# Altium PCB Main.PcbDoc (part 3 of 4)
Units mm, origin at the board's own origin, x right, y up, seen from the top; angles counter-clockwise.
Board outline 282.3 x 31.89 mm, 2 copper layers (Top Layer, Bottom Layer); 208 components, 197 nets, 886 pads, 366 vias.
Unrouted connection lines stored in the file: 118.
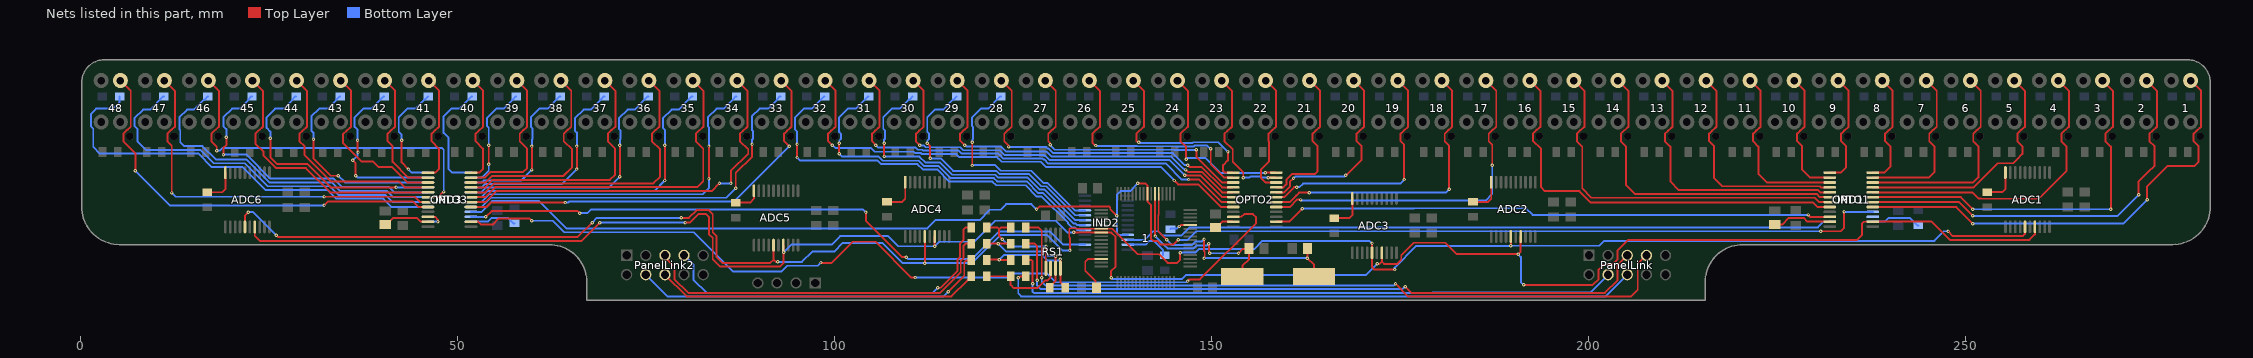
[diagram p3: the nets of this part, all layers, seen from the top]

## Via types
v1: diameter 0.45, hole 0.2, Top Layer to Bottom Layer, 362 vias
v2: diameter 5.5, hole 3.2, Top Layer to Bottom Layer, 4 vias

## Nets (pads, with @x,y where several pads share a name; then routed paths per layer and width w, separated by ;. In a path a pad name is that pad's centre, name@x,y a point inside that pad or via, vN(x,y) a via of type N, cw(c..) or ccw(c..) an arc to the next point about the centre after c; other vN are vias at no path point) (continued)
LED_IND28: IND2.9 L1_IndicatorLED28.K | length 28.8
  Top Layer w0.254: v1(118.237,31.232) 118.237,28.159 v1(118.246,28.15)
  Bottom Layer w0.254: v1(118.237,31.232) 118.241,31.236 118.241,31.577 118.342,31.677 118.342,33.248 118.22,33.37 118.22,34.527 119.38,35.687 120.326,35.687 121.944,37.305 L1_IndicatorLED28.K@122.019,37.305 ; v1(118.246,28.15) 118.284,28.188 118.422,28.188 118.429,28.194 121.285,28.194 121.466,28.013 121.473,28.013 122.035,27.451 126.085,27.451 127.682,25.854 128.204,25.854 131.859,22.199 IND2.9@133.167,22.199
LED_IND29: IND2.8 L1_IndicatorLED29.K | length 34.5
  Top Layer w0.254: v1(112.268,31.124) 112.268,31.071 112.649,30.69 v1(112.649,29.112)
  Bottom Layer w0.254: v1(112.268,31.124) 112.268,31.445 112.5,31.677 112.5,32.363 112.268,32.595 112.268,34.544 113.284,35.56 114.357,35.56 115.679,36.882 115.754,36.882 L1_IndicatorLED29.K@116.177,37.305 ; v1(112.649,29.112) 112.678,29.083 114.046,29.083 115.697,27.432 121.412,27.432 121.847,26.997 125.784,26.997 127.381,25.4 128.016,25.4 131.867,21.549 IND2.8@133.167,21.549
LED_IND30: IND2.7 L1_IndicatorLED30.K | length 40.5
  Top Layer w0.254: v1(106.553,31.115) 106.553,29.363 v1(106.566,29.35)
  Bottom Layer w0.254: v1(106.553,31.115) 106.553,31.572 106.658,31.677 106.658,32.796 106.426,33.028 106.426,34.544 107.569,35.687 108.587,35.687 109.783,36.882 109.912,36.882 L1_IndicatorLED30.K@110.335,37.305 ; v1(106.566,29.35) 106.579,29.337 111.233,29.337 112.039,28.531 113.956,28.531 115.563,26.924 121.278,26.924 121.659,26.543 125.596,26.543 127.193,24.946 127.828,24.946 131.873,20.901 132.141,20.901 132.143,20.899 IND2.7@133.167,20.899
LED_IND31: IND2.6 L1_IndicatorLED31.K | length 46.6
  Top Layer w0.254: v1(100.584,29.718) v1(100.584,31.115)
  Bottom Layer w0.254: v1(100.584,29.718) 100.936,29.366 105.744,29.366 105.782,29.327 105.808,29.327 106.35,28.785 111.143,28.785 111.851,28.077 113.768,28.077 115.375,26.47 121.09,26.47 121.525,26.035 125.462,26.035 127.005,24.492 127.64,24.492 131.685,20.447 131.953,20.447 132.151,20.249 IND2.6@133.167,20.249 ; v1(100.584,31.115) 100.593,31.124 100.593,31.455 100.816,31.677 100.816,32.363 100.584,32.595 100.584,34.544 101.727,35.687 102.8,35.687 104.418,37.305 L1_IndicatorLED31.K@104.493,37.305
LED_IND32: IND2.5 L1_IndicatorLED32.K | length 52.7
  Top Layer w0.254: v1(94.996,29.21) v1(94.996,30.988)
  Bottom Layer w0.254: v1(94.996,29.21) 95.377,28.829 105.664,28.829 106.162,28.331 110.955,28.331 111.663,27.623 113.58,27.623 115.187,26.016 120.902,26.016 121.391,25.527 125.328,25.527 126.817,24.038 127.452,24.038 130.937,20.553 130.937,20.447 131.445,19.939 131.819,19.939 132.141,19.617 133.149,19.617 IND2.5@133.167,19.599 ; v1(94.996,30.988) 94.996,32.639 94.742,32.893 94.742,34.544 95.885,35.687 96.967,35.687 98.153,36.873 98.153,36.882 98.576,37.305 L1_IndicatorLED32.K@98.651,37.305
LED_IND33: IND3.20 L1_IndicatorLED33.K | length 51.6
  Top Layer w0.254: v1(86.868,25.146) 86.868,27.178 89.027,29.337 v1(89.027,30.988)
  Bottom Layer w0.254: IND3.20@51.745,22.647 53.12,22.647 54.352,23.88 60.964,23.88 60.967,23.876 85.598,23.876 v1(86.868,25.146) ; v1(89.027,30.988) 89.027,31.572 89.132,31.677 89.132,32.732 89.01,32.854 89.01,34.654 90.043,35.687 91.191,35.687 92.311,36.807 92.311,36.882 92.734,37.305 L1_IndicatorLED33.K@92.809,37.305
LED_IND34: IND3.19 L1_IndicatorLED34.K | length 46.7
  Top Layer w0.254: v1(83.312,26.416) v1(83.312,30.734)
  Bottom Layer w0.254: IND3.19@51.745,23.297 53.128,23.297 54.164,24.334 82.5,24.334 83.312,25.146 v1(83.312,26.416) ; v1(83.312,30.734) 83.312,33.226 83.168,33.37 83.168,34.47 83.185,34.487 83.185,34.544 84.328,35.687 85.274,35.687 86.469,36.882 86.892,37.305 L1_IndicatorLED34.K@86.967,37.305
LED_IND35: IND3.18 L1_IndicatorLED35.K | length 40.1
  Top Layer w0.254: v1(77.47,26.162) v1(77.47,30.861)
  Bottom Layer w0.254: IND3.18@51.745,23.947 53.136,23.947 53.976,24.788 76.096,24.788 v1(77.47,26.162) ; v1(77.47,30.861) 77.47,32.893 77.216,33.147 77.216,34.417 78.359,35.56 79.305,35.56 81.05,37.305 L1_IndicatorLED35.K@81.125,37.305
LED_IND36: IND3.17 L1_IndicatorLED36.K | length 33.6
  Top Layer w0.254: v1(71.501,26.67) v1(71.501,30.861)
  Bottom Layer w0.254: IND3.17@51.745,24.597 53.144,24.597 53.788,25.242 70.073,25.242 v1(71.501,26.67) ; v1(71.501,30.861) 71.501,31.572 71.606,31.677 71.606,32.788 71.374,33.02 71.374,34.417 72.517,35.56 73.463,35.56 75.208,37.305 L1_IndicatorLED36.K@75.283,37.305
LED_IND37: IND3.16 L1_IndicatorLED37.K | length 27
  Top Layer w0.254: v1(65.786,27.686) v1(65.786,30.734)
  Bottom Layer w0.254: IND3.16@51.745,25.247 53.152,25.247 53.6,25.696 63.796,25.696 v1(65.786,27.686) ; v1(65.786,30.734) 65.786,32.512 65.532,32.766 65.532,34.417 66.675,35.56 67.621,35.56 68.943,36.882 69.366,37.305 L1_IndicatorLED37.K@69.441,37.305
LED_IND38: IND3.15 L1_IndicatorLED38.K | length 20.9
  Top Layer w0.254: v1(59.817,27.559) v1(59.817,30.734)
  Bottom Layer w0.254: IND3.15@51.745,25.897 53.16,25.897 53.412,26.15 54.09,26.15 54.102,26.162 58.42,26.162 v1(59.817,27.559) ; v1(59.817,30.734) 59.817,31.572 59.922,31.677 59.922,33.042 59.69,33.274 59.69,34.544 60.833,35.687 61.906,35.687 63.524,37.305 L1_IndicatorLED38.K@63.599,37.305
LED_IND39: IND3.14 L1_IndicatorLED39.K | length 14.9
  Top Layer w0.254: v1(54.102,28.321) v1(54.102,30.861)
  Bottom Layer w0.254: IND3.14@51.749,26.543 IND3.14@51.745,26.547 53.168,26.547 53.224,26.604 53.274,26.604 54.102,27.432 v1(54.102,28.321) ; v1(54.102,30.861) 54.102,33.147 53.848,33.401 53.848,34.417 55.118,35.687 56.064,35.687 57.259,36.882 57.682,37.305 L1_IndicatorLED39.K@57.757,37.305
LED_IND40: IND3.13 L1_IndicatorLED40.K | length 15.3
  Bottom Layer w0.254: IND3.13@51.745,27.197 49.257,27.197 48.768,27.686 48.768,31.833 48.116,32.485 48.116,34.654 49.149,35.687 50.222,35.687 51.84,37.305 L1_IndicatorLED40.K@51.915,37.305
LED_IND41: IND3.12 L1_IndicatorLED41.K | length 15.3
  Top Layer w0.254: v1(42.545,31.496) 42.545,28.575 v1(43.434,27.686)
  Bottom Layer w0.254: v1(42.545,31.496) 42.545,32.214 42.164,32.595 42.164,34.544 43.307,35.687 44.325,35.687 45.521,36.882 45.65,36.882 L1_IndicatorLED41.K@46.073,37.305 ; v1(43.434,27.686) 43.923,27.197 IND3.12@46.045,27.197
LED_IND42: IND3.11 L1_IndicatorLED42.K | length 23.1
  Top Layer w0.254: v1(36.068,28.829) 36.449,28.448 v1(36.449,26.797) ; v1(36.703,31.496) 36.703,30.099 36.728,30.074 36.728,29.966 v1(36.766,29.928)
  Bottom Layer w0.254: v1(36.068,28.829) 36.703,29.464 36.703,29.727 36.728,29.752 36.728,29.89 v1(36.766,29.928) ; v1(36.449,26.797) 36.699,26.547 IND3.11@46.045,26.547 ; v1(36.703,31.496) 36.703,32.893 36.322,33.274 36.322,34.544 37.465,35.687 38.538,35.687 39.733,36.882 40.156,37.305 L1_IndicatorLED42.K@40.231,37.305
LED_IND43: IND3.10 L1_IndicatorLED43.K | length 27.1
  Top Layer w0.254: v1(30.861,31.623) 30.861,29.083 33.147,26.797 v1(34.163,26.797)
  Bottom Layer w0.254: v1(30.861,31.623) 30.861,32.512 30.59,32.783 30.59,34.654 31.623,35.687 32.771,35.687 33.891,36.807 33.891,36.882 34.314,37.305 L1_IndicatorLED43.K@34.389,37.305 ; v1(34.163,26.797) 35.063,25.897 IND3.10@46.045,25.897
LED_IND44: IND3.9 L1_IndicatorLED44.K | length 33.2
  Top Layer w0.254: v1(25.146,31.75) 25.146,29.217 26.039,28.325 30.095,28.325 33.173,25.247 v1(41.809,25.247)
  Bottom Layer w0.254: v1(25.146,31.75) 25.146,32.639 24.638,33.147 24.638,34.544 25.781,35.687 26.929,35.687 28.049,36.807 28.049,36.882 28.472,37.305 L1_IndicatorLED44.K@28.547,37.305 ; v1(41.809,25.247) IND3.9@46.045,25.247
LED_IND45: IND3.8 L1_IndicatorLED45.K | length 39.4
  Top Layer w0.254: v1(18.923,29.591) 18.923,30.48 19.304,30.861 v1(19.304,31.877)
  Bottom Layer w0.254: v1(18.923,29.591) 21.978,29.591 25.153,26.416 33.528,26.416 34.671,25.273 40.894,25.273 41.57,24.597 IND3.8@46.045,24.597 ; v1(19.304,31.877) 19.304,32.972 18.906,33.37 18.906,34.47 18.923,34.487 18.923,34.544 20.066,35.687 21.087,35.687 22.207,36.807 22.207,36.882 22.63,37.305 L1_IndicatorLED45.K@22.705,37.305
LED_IND46: IND3.7 L1_IndicatorLED46.K | length 44.2
  Bottom Layer w0.254: L1_IndicatorLED46.K@16.863,37.305 16.44,36.882 16.308,36.882 14.986,35.56 14.097,35.56 13.081,34.544 13.081,34.487 13.064,34.47 13.064,32.928 13.186,32.806 13.186,31.264 13.716,30.734 16.129,30.734 17.907,28.956 21.971,28.956 25.019,25.908 33.274,25.908 34.417,24.765 40.64,24.765 41.458,23.947 IND3.7@46.045,23.947
LED_IND47: IND3.6 L1_IndicatorLED47.K | length 50.2
  Bottom Layer w0.254: L1_IndicatorLED47.K@11.021,37.305 10.946,37.305 9.201,35.56 8.255,35.56 7.112,34.417 7.112,33.401 7.493,33.02 7.493,31.369 8.636,30.226 15.868,30.226 17.646,28.448 21.717,28.448 24.765,25.4 33.02,25.4 34.163,24.257 40.386,24.257 41.346,23.297 IND3.6@46.045,23.297
LED_IND48: IND3.5 L1_IndicatorLED48.K | length 57.4
  Bottom Layer w0.254: L1_IndicatorLED48.K@5.154,37.28 5.154,36.523 4.318,35.687 2.032,35.687 1.326,34.981 1.326,33.348 1.651,33.023 1.651,30.607 2.54,29.718 15.621,29.718 17.399,27.94 21.463,27.94 24.511,24.892 32.766,24.892 33.909,23.749 40.132,23.749 41.234,22.647 IND3.5@46.045,22.647
LED_SENS1: 1.K OPTO1.5 | length 60.6
  Top Layer w0.254: OPTO1.5@237.673,22.647 248.752,22.647 v1(250.952,20.447) ; v1(274.066,23.622) 274.066,25.4 276.733,28.067 280.328,28.067 280.88,28.619 280.88,30.701 280.21,31.371 280.21,32.385 280.616,32.79 ccw(c278.091,36.38) 281.202,33.285 281.202,38.039 1.K@279.821,39.42
  Bottom Layer w0.254: v1(250.952,20.447) 270.891,20.447 v1(274.066,23.622)
LED_SENS2: 2.K OPTO1.6 | length 54.5
  Top Layer w0.254: OPTO1.6@237.673,23.297 249.118,23.297 v1(250.952,21.463) ; v1(272.923,24.257) 272.923,26.032 273.59,26.699 274.164,27.273 275.038,28.147 275.038,30.701 274.368,31.371 274.368,32.385 274.774,32.79 ccw(c272.249,36.38) 275.36,33.285 275.36,38.039 2.K@273.979,39.42
  Bottom Layer w0.254: v1(250.952,21.463) 270.129,21.463 v1(272.923,24.257)
LED_SENS3: 3.K OPTO1.7 | length 50.6
  Top Layer w0.254: OPTO1.7@237.673,23.947 249.357,23.947 v1(250.952,22.352) ; 3.K@268.137,39.42 269.518,38.039 269.518,33.285 cw(c266.407,36.38) 268.932,32.79 268.526,32.385 268.526,31.371 269.24,30.657 269.24,28.575 v1(269.24,22.352)
  Bottom Layer w0.254: v1(250.952,22.352) v1(269.24,22.352)
LED_SENS4: 4.K OPTO1.8 | length 40.9
  Top Layer w0.254: OPTO1.8@237.673,24.597 250.866,24.597 251.714,23.749 252.041,23.749 252.049,23.741 259.707,23.741 263.354,27.388 263.354,30.701 262.684,31.371 262.684,32.385 263.09,32.79 ccw(c260.565,36.38) 263.676,33.285 263.676,38.039 4.K@262.295,39.42
LED_SENS5: 5.K OPTO1.9 | length 32.7
  Top Layer w0.254: OPTO1.9@237.673,25.247 251.053,25.247 254.259,28.453 256.286,28.453 256.741,28.908 257.512,29.679 257.512,30.701 256.842,31.371 256.842,32.385 257.248,32.79 ccw(c254.723,36.38) 257.834,33.285 257.834,38.039 5.K@256.453,39.42
LED_SENS6: 6.K OPTO1.10 | length 28.4
  Top Layer w0.254: OPTO1.10@237.673,25.897 250.985,25.897 251.67,26.582 251.67,30.701 251,31.371 251,32.385 251.406,32.79 ccw(c248.881,36.38) 251.992,33.285 251.992,38.039 6.K@250.611,39.42
LED_SENS7: 7.K OPTO1.11 | length 21.9
  Top Layer w0.254: OPTO1.11@237.673,26.547 245.114,26.547 245.828,27.261 245.828,30.701 245.158,31.371 245.158,32.385 245.564,32.79 ccw(c243.039,36.38) 246.15,33.285 246.15,38.039 7.K@244.769,39.42
LED_SENS8: 8.K OPTO1.12 | length 15.4
  Top Layer w0.254: OPTO1.12@237.673,27.197 239.16,27.197 240.03,28.067 240.03,30.657 239.316,31.371 239.316,32.385 239.722,32.79 ccw(c237.197,36.38) 240.308,33.285 240.308,38.039 8.K@238.927,39.42
LED_SENS9: 9.K OPTO1.13 | length 15.3
  Top Layer w0.254: OPTO1.13@231.973,27.197 233.445,27.197 234.144,27.896 234.144,30.701 233.474,31.371 233.474,32.385 233.88,32.79 ccw(c231.355,36.38) 234.466,33.285 234.466,38.039 9.K@233.085,39.42
LED_SENS10: 10.K OPTO1.14 | length 17.2
  Top Layer w0.254: 10.K@227.243,39.42 228.624,38.039 228.624,33.285 cw(c225.513,36.38) 228.038,32.79 227.632,32.385 227.632,31.371 228.302,30.701 228.302,27.603 229.358,26.547 OPTO1.14@231.973,26.547
LED_SENS11: 11.K OPTO1.15 | length 23.6
  Top Layer w0.254: 11.K@221.401,39.42 222.782,38.039 222.782,33.285 cw(c219.671,36.38) 222.196,32.79 221.79,32.385 221.79,31.371 222.504,30.657 222.504,27.03 223.626,25.908 230.886,25.908 230.897,25.897 OPTO1.15@231.973,25.897
LED_SENS12: 12.K OPTO1.16 | length 30.1
  Top Layer w0.254: 12.K@215.559,39.42 216.94,38.039 216.94,33.285 cw(c213.829,36.38) 216.354,32.79 215.948,32.385 215.948,31.371 216.618,30.701 216.618,26.46 217.678,25.4 230.628,25.4 230.781,25.247 OPTO1.16@231.973,25.247
LED_SENS13: 13.K OPTO1.17 | length 36.4
  Top Layer w0.254: 13.K@209.717,39.42 211.098,38.039 211.098,33.285 cw(c207.987,36.38) 210.512,32.79 210.106,32.385 210.106,31.371 210.82,30.657 210.82,26.035 211.963,24.892 230.418,24.892 230.713,24.597 OPTO1.17@231.973,24.597
LED_SENS14: 14.K OPTO1.18 | length 42.9
  Top Layer w0.254: 14.K@203.875,39.42 205.256,38.039 205.256,33.285 cw(c202.145,36.38) 204.67,32.79 204.264,32.385 204.264,31.371 204.934,30.701 204.934,25.571 206.121,24.384 230.207,24.384 230.644,23.947 OPTO1.18@231.973,23.947
LED_SENS15: 15.K OPTO1.19 | length 49.2
  Top Layer w0.254: 15.K@198.033,39.42 199.414,38.039 199.414,33.285 cw(c196.303,36.38) 198.828,32.79 198.422,32.385 198.422,31.371 199.136,30.657 199.136,25.102 200.362,23.876 229.997,23.876 230.576,23.297 OPTO1.19@231.973,23.297
LED_SENS16: 16.K OPTO1.20 | length 55
  Top Layer w0.254: 16.K@192.191,39.42 193.572,38.039 193.572,33.285 cw(c190.461,36.38) 192.986,32.79 192.58,32.385 192.58,31.448 193.675,30.353 193.675,25.273 194.183,24.765 198.755,24.765 200.279,23.241 229.747,23.241 230.343,22.645 231.971,22.645 OPTO1.20@231.973,22.647
LED_SENS17: 17.K OPTO2.5 | length 45.7
  Top Layer w0.254: OPTO2.5@158.552,22.647 160.315,22.647 161.29,23.622 161.296,23.616 161.76,23.616 v1(161.798,23.578) ; 17.K@186.349,39.42 187.73,38.039 187.73,33.285 cw(c184.619,36.38) 187.144,32.79 186.738,32.385 186.738,31.371 187.198,30.911 v1(187.198,28.194)
  Bottom Layer w0.254: v1(161.798,23.578) 161.851,23.578 161.934,23.495 186.309,23.495 187.198,24.384 v1(187.198,28.194)
LED_SENS18: 18.K OPTO2.6 | length 39.3
  Top Layer w0.254: OPTO2.6@158.552,23.297 160.323,23.297 161.181,24.155 161.188,24.155 161.588,24.555 v1(162.941,24.555) ; 18.K@180.507,39.42 181.888,38.039 181.888,33.285 cw(c178.777,36.38) 181.302,32.79 180.896,32.385 180.896,31.371 181.483,30.784 v1(181.483,25.019)
  Bottom Layer w0.254: v1(162.941,24.555) 181.015,24.555 181.479,25.019 v1(181.483,25.019)
LED_SENS19: 19.K OPTO2.7 | length 32.3
  Top Layer w0.254: OPTO2.7@158.552,23.947 159.583,23.947 160.909,25.273 v1(161.29,25.273) ; 19.K@174.665,39.42 176.046,38.039 176.046,33.285 cw(c172.935,36.38) 175.46,32.79 175.054,32.385 175.054,31.371 175.514,30.911 v1(175.514,26.289)
  Bottom Layer w0.254: v1(161.29,25.273) 161.294,25.277 161.635,25.277 162.12,25.762 174.987,25.762 v1(175.514,26.289)
LED_SENS20: 20.K OPTO2.8 | length 25.3
  Top Layer w0.254: OPTO2.8@158.552,24.597 159.591,24.597 160.401,25.407 160.401,26.035 160.782,26.416 160.801,26.416 v1(160.845,26.46) ; v1(167.767,26.841) 167.811,26.841 169.882,28.912 169.882,30.701 169.212,31.371 169.212,32.385 169.618,32.79 ccw(c167.093,36.38) 170.204,33.285 170.204,38.039 20.K@168.823,39.42
  Bottom Layer w0.254: v1(160.845,26.46) 160.879,26.46 161.089,26.67 167.543,26.67 167.714,26.841 v1(167.767,26.841)
LED_SENS21: 21.K OPTO2.9 | length 20.1
  Top Layer w0.254: OPTO2.9@158.552,25.247 158.562,25.257 159.496,25.257 159.893,25.654 159.893,26.289 160.655,27.051 163.703,27.051 164.04,27.388 164.04,30.701 163.37,31.371 163.37,32.385 163.776,32.79 ccw(c161.251,36.38) 164.362,33.285 164.362,38.039 21.K@162.981,39.42
LED_SENS22: 22.K OPTO2.10 | length 16.7
  Top Layer w0.254: 22.K@157.139,39.42 158.52,38.039 158.52,33.285 cw(c155.409,36.38) 157.934,32.79 157.528,32.385 157.528,31.371 157.596,31.303 157.596,28.691 156.547,27.642 156.547,26.46 157.11,25.897 OPTO2.10@158.552,25.897
LED_SENS23: 23.K OPTO2.11 | length 19.4
  Top Layer w0.254: 23.K@151.297,39.42 152.678,38.039 152.678,33.285 cw(c149.567,36.38) 152.092,32.79 151.686,32.385 151.686,31.371 152.781,30.276 152.781,28.653 153.735,27.699 154.178,27.256 v1(154.178,26.543) ; v1(157.48,26.543) 157.482,26.545 158.55,26.545 OPTO2.11@158.552,26.547
  Bottom Layer w0.254: v1(154.178,26.543) 155.004,26.543 155.13,26.67 156.528,26.67 156.654,26.543 v1(157.48,26.543)
LED_SENS24: 24.K OPTO2.12 | length 24.6
  Top Layer w0.254: 24.K@145.455,39.42 146.836,38.039 146.836,33.285 cw(c143.725,36.38) 146.25,32.79 145.844,32.385 145.844,31.371 146.602,30.613 v1(146.602,28.966) ; v1(157.099,27.178) 157.118,27.197 OPTO2.12@158.552,27.197
  Bottom Layer w0.254: v1(146.602,28.966) 146.807,29.171 149.137,29.171 151.13,27.178 v1(157.099,27.178)
LED_SENS25: 25.K OPTO2.13 | length 26.1
  Top Layer w0.254: 25.K@139.613,39.42 140.994,38.039 140.994,33.285 cw(c137.883,36.38) 140.408,32.79 140.002,32.385 140.002,31.4 140.113,31.289 140.297,31.289 v1(140.335,31.251) ; v1(152.146,29.972) 152.146,28.829 151.511,28.194 151.511,27.432 151.746,27.197 OPTO2.13@152.852,27.197
  Bottom Layer w0.254: v1(140.335,31.251) 140.388,31.251 140.486,31.153 145.398,31.153 145.417,31.134 147.44,31.134 147.538,31.232 150.886,31.232 v1(152.146,29.972)
LED_SENS26: 26.K OPTO2.14 | length 31.1
  Top Layer w0.254: 26.K@133.771,39.42 135.152,38.039 135.152,33.285 cw(c132.041,36.38) 134.566,32.79 134.16,32.385 134.16,31.181 134.446,30.895 134.469,30.895 134.567,30.797 v1(134.62,30.797) ; v1(149.86,30.353) 149.86,28.321 151.634,26.547 OPTO2.14@152.852,26.547
  Bottom Layer w0.254: v1(134.62,30.797) 134.658,30.759 134.796,30.759 134.822,30.734 140.071,30.734 140.106,30.699 145.21,30.699 145.229,30.68 147.628,30.68 147.726,30.778 149.382,30.778 149.807,30.353 v1(149.86,30.353)
LED_SENS27: 27.K OPTO2.15 | length 36.6
  Top Layer w0.254: 27.K@127.929,39.42 129.31,38.039 129.31,33.285 cw(c126.199,36.38) 128.724,32.79 128.318,32.385 128.318,31.371 128.524,31.165 128.524,30.964 v1(128.56,30.928) ; v1(147.955,30.226) 147.955,29.299 151.357,25.897 OPTO2.15@152.852,25.897
  Bottom Layer w0.254: v1(128.56,30.928) 128.56,30.875 128.658,30.777 128.658,30.741 129.154,30.245 145.022,30.245 145.041,30.226 v1(147.955,30.226)
LED_SENS28: 28.K OPTO2.16 | length 42.1
  Top Layer w0.254: 28.K@122.087,39.42 123.468,38.039 123.468,33.285 cw(c120.357,36.38) 122.882,32.79 122.476,32.385 122.476,31.371 123.063,30.784 v1(123.063,30.607) ; v1(146.812,28.194) 147.066,27.94 148.672,27.94 151.365,25.247 OPTO2.16@152.852,25.247
  Bottom Layer w0.254: v1(123.063,30.607) 128.016,30.607 128.197,30.426 128.331,30.426 128.966,29.791 144.834,29.791 146.431,28.194 v1(146.812,28.194)
LED_SENS29: 29.K OPTO2.17 | length 48
  Top Layer w0.254: 29.K@116.245,39.42 117.626,38.039 117.626,33.285 cw(c114.515,36.38) 117.04,32.79 116.634,32.385 116.634,31.448 v1(117.221,30.861) ; v1(146.558,27.559) 146.812,27.305 148.664,27.305 151.372,24.597 OPTO2.17@152.852,24.597
  Bottom Layer w0.254: v1(117.221,30.861) 117.274,30.861 117.455,30.68 121.981,30.68 122.035,30.626 122.07,30.626 122.686,30.01 127.879,30.01 127.917,29.972 128.143,29.972 128.778,29.337 144.646,29.337 146.243,27.74 146.25,27.74 146.333,27.657 146.407,27.657 146.505,27.559 v1(146.558,27.559)
LED_SENS30: 30.K OPTO2.18 | length 54.2
  Top Layer w0.254: 30.K@110.403,39.42 111.784,38.039 111.784,33.285 cw(c108.673,36.38) 111.198,32.79 110.792,32.385 110.792,31.321 v1(111.252,30.861) ; v1(146.431,26.841) 148.486,26.841 151.38,23.947 OPTO2.18@152.852,23.947
  Bottom Layer w0.254: v1(111.252,30.861) 111.29,30.823 111.788,30.823 112.039,30.572 116.621,30.572 116.64,30.553 116.647,30.553 117.028,30.172 121.868,30.172 122.03,30.01 122.044,30.01 122.498,29.556 127.691,29.556 127.764,29.483 127.87,29.483 127.943,29.41 127.95,29.41 128.477,28.883 144.345,28.883 146.387,26.841 v1(146.431,26.841)
LED_SENS31: 31.K OPTO2.19 | length 60.4
  Top Layer w0.254: 31.K@104.561,39.42 105.942,38.039 105.942,33.285 cw(c102.831,36.38) 105.356,32.79 104.95,32.385 104.95,31.371 105.46,30.861 v1(105.41,30.861) ; v1(146.92,26.289) 148.336,26.289 151.328,23.297 OPTO2.19@152.852,23.297
  Bottom Layer w0.254: v1(105.41,30.861) 105.424,30.861 105.722,30.563 110.661,30.563 110.979,30.245 111.609,30.245 111.736,30.118 116.44,30.118 116.84,29.718 121.68,29.718 121.842,29.556 121.856,29.556 122.31,29.102 127.503,29.102 127.649,28.956 127.762,28.956 128.324,28.394 143.945,28.394 146.05,26.289 v1(146.92,26.289)
LED_SENS32: 32.K OPTO2.20 | length 66.5
  Top Layer w0.254: 32.K@98.719,39.42 100.1,38.039 100.1,33.285 cw(c96.989,36.38) 99.514,32.79 99.108,32.385 99.108,31.371 99.663,30.816 v1(99.663,30.861) ; v1(145.034,26.162) 145.542,25.654 148.209,25.654 151.208,22.655 151.38,22.655 151.388,22.647 OPTO2.20@152.852,22.647
  Bottom Layer w0.254: v1(99.663,30.861) 99.695,30.861 100.076,30.48 104.775,30.48 105.283,29.972 110.497,29.972 110.678,29.791 111.421,29.791 111.548,29.664 116.132,29.664 116.532,29.264 121.492,29.264 121.654,29.102 121.668,29.102 122.122,28.648 127.315,28.648 128.023,27.94 143.275,27.94 145.034,26.181 v1(145.034,26.162)
LED_SENS33: 33.K OPTO3.5 | length 55.5
  Top Layer w0.254: OPTO3.5@51.745,22.647 53.748,22.647 54.342,23.241 v1(64.262,23.241) ; 33.K@92.877,39.42 94.258,38.039 94.258,33.285 cw(c91.147,36.38) 93.672,32.79 93.266,32.385 93.266,31.371 v1(93.936,30.701)
  Bottom Layer w0.254: v1(64.262,23.241) 64.643,23.241 64.77,23.368 86.603,23.368 v1(93.936,30.701)
LED_SENS34: 34.K OPTO3.6 | length 51.6
  Top Layer w0.254: OPTO3.6@51.745,23.297 53.65,23.297 55.118,24.765 83.693,24.765 v1(84.709,25.781) ; v1(86.233,25.781) 86.233,27.432 88.519,29.718 88.519,30.276 87.424,31.371 87.424,32.385 87.83,32.79 ccw(c85.305,36.38) 88.416,33.285 88.416,38.039 34.K@87.035,39.42
  Bottom Layer w0.254: v1(84.709,25.781) v1(86.233,25.781)
LED_SENS35: 35.K OPTO3.7 | length 46.5
  Top Layer w0.254: OPTO3.7@51.745,23.947 53.658,23.947 54.984,25.273 81.788,25.273 82.55,26.035 82.55,30.403 81.582,31.371 81.582,32.385 81.988,32.79 ccw(c79.463,36.38) 82.574,33.285 82.574,38.039 35.K@81.193,39.42
LED_SENS36: 36.K OPTO3.8 | length 40.2
  Top Layer w0.254: OPTO3.8@51.745,24.597 53.666,24.597 54.85,25.781 75.946,25.781 76.835,26.67 76.835,30.276 75.74,31.371 75.74,32.385 76.146,32.79 ccw(c73.621,36.38) 76.732,33.285 76.732,38.039 36.K@75.351,39.42
LED_SENS37: 37.K OPTO3.9 | length 33.7
  Top Layer w0.254: OPTO3.9@51.745,25.247 53.674,25.247 54.662,26.235 70.177,26.235 70.866,26.924 70.866,30.403 69.898,31.371 69.898,32.385 70.304,32.79 ccw(c67.779,36.38) 70.89,33.285 70.89,38.039 37.K@69.509,39.42
LED_SENS38: 38.K OPTO3.10 | length 27.2
  Top Layer w0.254: OPTO3.10@51.745,25.897 53.682,25.897 54.528,26.743 63.954,26.743 65.151,27.94 65.151,30.276 64.056,31.371 64.056,32.385 64.462,32.79 ccw(c61.937,36.38) 65.048,33.285 65.048,38.039 38.K@63.667,39.42
LED_SENS39: 39.K OPTO3.11 | length 21
  Top Layer w0.254: OPTO3.11@51.745,26.547 53.598,26.547 54.356,27.305 58.674,27.305 59.182,27.813 59.182,30.403 58.214,31.371 58.214,32.385 58.62,32.79 ccw(c56.095,36.38) 59.206,33.285 59.206,38.039 39.K@57.825,39.42
LED_SENS40: 40.K OPTO3.12 | length 14.9
  Top Layer w0.254: OPTO3.12@51.745,27.197 52.851,27.197 53.34,27.686 53.34,30.403 52.372,31.371 52.372,32.385 52.778,32.79 ccw(c50.253,36.38) 53.364,33.285 53.364,38.039 40.K@51.983,39.42
LED_SENS41: 41.K OPTO3.13 | length 14.8
  Top Layer w0.254: OPTO3.13@46.045,27.197 47.009,27.197 47.498,27.686 47.498,30.403 46.53,31.371 46.53,32.385 46.936,32.79 ccw(c44.411,36.38) 47.522,33.285 47.522,38.039 41.K@46.141,39.42
LED_SENS42: 42.K OPTO3.14 | length 17.6
  Top Layer w0.254: 42.K@40.299,39.42 41.68,38.039 41.68,33.285 cw(c38.569,36.38) 41.094,32.79 40.688,32.385 40.688,31.371 41.358,30.701 41.358,28.619 43.43,26.547 OPTO3.14@46.045,26.547
LED_SENS43: 43.K OPTO3.15 | length 22.7
  Top Layer w0.254: 43.K@34.457,39.42 35.838,38.039 35.838,33.285 cw(c32.727,36.38) 35.252,32.79 34.798,32.337 34.798,31.115 37.211,28.702 38.735,28.702 38.916,28.521 38.923,28.521 39.504,27.94 41.275,27.94 43.318,25.897 OPTO3.15@46.045,25.897
LED_SENS44: 44.K OPTO3.16 | length 29.3
  Top Layer w0.254: 44.K@28.615,39.42 29.996,38.039 29.996,33.285 cw(c26.885,36.38) 29.41,32.79 29.004,32.385 29.004,31.371 29.674,30.701 29.674,29.508 33.147,26.035 42.164,26.035 42.952,25.247 OPTO3.16@46.045,25.247
LED_SENS45: 45.K OPTO3.17 | length 35.2
  Top Layer w0.254: 45.K@22.773,39.42 24.154,38.039 24.154,33.285 cw(c21.043,36.38) 23.568,32.79 23.162,32.385 23.162,31.067 24.257,29.972 24.257,29.464 25.908,27.813 29.845,27.813 33.061,24.597 OPTO3.17@46.045,24.597
LED_SENS46: 46.K OPTO3.18 | length 49
  Top Layer w0.254: 46.K@16.931,39.42 18.312,38.039 18.312,33.285 cw(c15.201,36.38) 17.726,32.79 17.32,32.385 17.32,31.371 18.034,30.657 v1(18.034,30.099) ; OPTO3.18@46.045,23.947 47.389,23.947 48.08,24.638 v1(48.133,24.638)
  Bottom Layer w0.254: v1(18.034,30.099) 18.072,30.137 18.453,30.137 18.796,30.48 47.879,30.48 48.133,30.226 v1(48.133,24.638)
LED_SENS47: 47.K OPTO3.19 | length 50.6
  Top Layer w0.254: 47.K@11.089,39.42 12.47,38.039 12.47,33.285 cw(c9.359,36.38) 11.884,32.79 11.478,32.385 11.478,31.371 12.065,30.784 v1(12.065,24.511) ; v1(32.258,24.003) 44.323,24.003 45.029,23.297 OPTO3.19@46.045,23.297
  Bottom Layer w0.254: v1(12.065,24.511) 12.573,24.003 v1(32.258,24.003)
LED_SENS48: 48.K OPTO3.20 | length 54.9
  Top Layer w0.254: 48.K@5.247,39.42 6.628,38.039 6.628,33.285 cw(c3.517,36.38) 6.042,32.79 5.636,32.385 5.636,31.371 7.239,29.768 v1(7.239,27.432) ; v1(32.258,22.86) 32.766,23.368 44.069,23.368 44.79,22.647 OPTO3.20@46.045,22.647
  Bottom Layer w0.254: v1(7.239,27.432) 11.811,22.86 v1(32.258,22.86)
MISO: 1.22 ADC1.15 ADC2.15 ADC3.15 ADC4.15 ADC5.15 ADC6.15 | length 271.8
  Top Layer w0.254: ADC6.15@21.773,20.006 21.773,21.519 v1(22.225,21.971) ; v1(25.908,18.923) 26.162,18.669 65.913,18.669 67.809,20.565 v1(67.827,20.565) ; v1(79.629,21.209) 80.645,21.209 81.661,22.225 83.312,22.225 83.82,21.717 83.82,19.304 84.328,18.796 84.328,16.002 85.09,15.24 91.44,15.24 91.877,15.677 ; ADC5.15@91.877,17.593 91.877,15.677 ; v1(92.456,15.367) 92.187,15.367 91.877,15.677 ; v1(111.943,15.196) ADC4.15@111.943,18.736 ; v1(131.191,16.891) 131.191,18.542 131.093,18.64 131.093,19.677 131.242,19.826 132.036,19.826 132.099,19.762 1.22@135.323,19.762 136.829,19.762 140.208,16.383 143.002,16.383 144.145,15.24 145.415,15.24 145.796,15.621 v1(145.796,16.593) ; v1(171.252,17.824) 171.252,14.676 171.577,14.351 v1(174.244,14.351) ; v1(189.66,17.501) 189.667,17.508 ADC2.15@189.667,18.736 ; v1(247.65,19.431) 248.285,18.796 255.031,18.796 255.036,18.791 257.551,18.791 257.848,19.088 257.848,20.004 ADC1.15@257.866,20.022
  Bottom Layer w0.254: v1(22.225,21.971) 22.86,21.971 v1(25.908,18.923) ; v1(67.827,20.565) 67.827,20.583 68.453,21.209 v1(79.629,21.209) ; v1(92.456,15.367) 95.638,15.367 97.016,16.745 99.944,16.745 101.087,17.888 106.318,17.888 109.01,15.196 v1(111.943,15.196) 111.969,15.222 118.254,15.222 121.99,18.958 128.108,18.958 130.175,16.891 v1(131.191,16.891) ; v1(145.796,16.593) 145.834,16.631 145.972,16.631 145.979,16.637 147.863,16.637 148.288,17.062 155.619,17.062 156.718,18.161 170.889,18.161 171.226,17.824 v1(171.252,17.824) ; v1(174.244,14.351) 174.244,14.605 177.14,17.501 v1(189.66,17.501) 189.667,17.508 201.404,17.508 202.057,18.161 221.615,18.161 245.828,18.161 247.098,19.431 v1(247.65,19.431)
MOSI: 1.23 ADC1.17 ADC2.17 ADC3.17 ADC4.17 ADC5.17 ADC6.17 OPTO1.2 | length 277.4
  Top Layer w0.254: ADC6.17@23.073,20.006 23.073,18.837 23.749,18.161 66.421,18.161 v1(68.834,20.574) ; v1(80.137,20.574) 80.772,20.574 81.915,21.717 82.931,21.717 83.312,21.336 83.312,19.05 83.82,18.542 83.82,15.748 84.836,14.732 92.71,14.732 93.218,15.24 v1(93.218,16.637) 93.195,16.66 93.195,17.575 ADC5.17@93.177,17.593 ; v1(113.243,17.443) ADC4.17@113.243,18.736 ; v1@131.7,19.262 1.23@135.323,19.262 136.686,19.262 137.238,18.711 137.238,14.746 136.652,14.16 v1(136.652,13.252) ; v1(171.958,15.113) 172.256,15.113 172.552,15.409 ; ADC3.17@172.552,16.577 172.552,15.409 ; v1@190.605,16.405 182.477,16.405 180.975,17.907 176.784,17.907 175.133,16.256 175.133,15.621 174.625,15.113 172.848,15.113 172.552,15.409 ; v1(190.627,16.383) 190.967,16.723 ADC2.17@190.967,18.736 ; v1(191.389,12.319) 200.533,12.319 201.295,13.081 201.295,14.351 201.93,14.986 203.073,14.986 203.835,15.748 203.835,16.891 205.232,18.288 235.585,18.288 236.22,18.923 236.22,20.447 236.468,20.695 237.671,20.695 OPTO1.2@237.673,20.697 245.495,20.697 247.904,18.288 254.82,18.288 254.825,18.283 258.44,18.283 259.166,19.009 ADC1.17@259.166,20.022
  Bottom Layer w0.254: v1(68.834,20.574) v1(80.137,20.574) ; v1(93.218,16.637) 94.234,17.653 99.568,17.653 100.711,18.796 107.061,18.796 108.417,17.44 110.385,17.44 110.388,17.443 110.846,17.443 110.849,17.44 113.24,17.44 v1(113.243,17.443) ; v1@113.243,17.44 113.837,18.034 118.491,18.034 119.688,19.231 119.695,19.231 121.292,20.828 129.286,20.828 130.84,19.274 v1(131.7,19.274) ; v1(136.652,13.252) 136.705,13.252 136.838,13.119 146.088,13.119 146.602,13.633 170.478,13.633 v1(171.958,15.113) ; v1(190.627,16.383) 191.008,16.002 191.008,12.7 v1(191.389,12.319)
Net1_5: 1.5 C_quartz1.2 X1.1 | length 32.5
  Top Layer w0.254: 1.5@142.971,24.41 142.971,21.636 142.899,21.565 142.899,19.407 v1(144.018,18.288) ; v1(148.971,15.875) 149.069,15.973 149.069,16.739 148.971,16.837 v1(148.971,18.362) ; v1@162.671,15.875 C_quartz1.2@162.671,17.145 ; v1(162.687,15.875) 163.576,14.986 X1.1@163.576,13.429
  Bottom Layer w0.254: v1(144.018,18.288) 144.685,17.621 147.415,17.621 147.879,18.085 148.695,18.085 v1(148.971,18.362) ; v1(148.971,15.875) v1(162.687,15.875)
Net1_6: 1.6 C_quartz2.2 X1.2 | length 24.6
  Top Layer w0.254: 1.6@142.471,24.41 142.471,21.778 142.445,21.753 142.445,18.898 142.494,18.849 v1(142.494,18.796) ; v1(149.606,17.78) 149.606,16.69 149.733,16.563 v1(149.733,16.51) ; v1(153.548,16.505) 153.548,16.515 154.124,17.091 154.902,17.091 154.94,17.129 154.94,15.748 154.051,14.859 X1.2@154.051,13.429
  Bottom Layer w0.254: v1(142.494,18.796) 143.764,17.526 144.145,17.145 147.574,17.145 147.596,17.167 147.603,17.167 147.962,17.526 149.352,17.526 v1(149.606,17.78) ; v1(149.733,16.51) 153.543,16.51 v1(153.548,16.505)
Net1_30: 1.30 C8.2 | length 6.3
  Top Layer w0.254: C8.2@134.731,11.938 134.577,12.092 134.577,12.87 133.223,14.224 133.223,15.367 133.618,15.762 1.30@135.323,15.762
Net1_60: 1.60 R_boot.2 | length 2.8
  Top Layer w0.254: v1(145.669,20.066) 145.719,20.066 145.908,20.256 1.60@147.126,20.256
  Bottom Layer w0.254: R_boot.2@144.526,19.701 144.63,19.805 145.408,19.805 v1(145.669,20.066)
NetPanelLink1_4: PanelLink.4 R5.2 | length 82.4
  Top Layer w0.254: R5.2@125.333,15.621 126.089,15.621 126.238,15.472 v1(126.238,12.446)
  Bottom Layer w0.254: v1(126.238,12.446) 126.238,11.396 126.387,11.247 178.689,11.247 ccw(c178.689,14.324) 179.273,11.303 200.195,11.303 PanelLink.4@202.565,13.673
NetPanelLink1_5: PanelLink.5 R7.2 | length 89
  Top Layer w0.254: R7.2@125.333,17.78 126.492,17.78 126.829,17.443 v1(126.829,12.954) ; v1(175.641,12.065) 176.459,11.247 202.128,11.247 203.835,12.954 203.835,14.963 PanelLink.5@205.105,16.233
  Bottom Layer w0.254: v1(126.829,12.954) 126.829,12.236 127.308,11.757 175.28,11.757 175.588,12.065 v1(175.641,12.065)
NetPanelLink1_6: PanelLink.6 R8.2 | length 85.3
  Top Layer w0.254: v1(124.333,13.272) 124.386,13.272 124.532,13.418 125.289,13.418 R8.2@125.333,13.462
  Bottom Layer w0.254: v1(124.333,13.272) 124.333,11.176 124.714,10.795 126.197,10.795 126.199,10.793 178.877,10.793 178.879,10.795 202.227,10.795 PanelLink.6@205.105,13.673
NetPanelLink1_7: PanelLink.7 R9.2 | length 94.5
  Top Layer w0.254: R9.2@125.333,19.939 127,19.939 127.456,19.483 v1(127.456,13.247) ; v1(174.371,12.446) 176.024,10.793 205.611,10.793 206.502,11.684 206.502,15.09 PanelLink.7@207.645,16.233
  Bottom Layer w0.254: v1(127.456,13.247) 127.456,12.752 127.997,12.211 174.124,12.211 174.359,12.446 v1(174.371,12.446)
NetPanelLink2_4: PanelLink2.4 R13.1 | length 47.4
  Top Layer w0.254: v1(115.062,11.43) 117.167,13.535 117.167,15.306 117.394,15.533 118.038,15.533 R13.1@118.126,15.621
  Bottom Layer w0.254: PanelLink2.4@74.93,13.673 77.81,10.793 114.425,10.793 v1(115.062,11.43)
NetPanelLink2_5: PanelLink2.5 R12.1 | length 48.4
  Top Layer w0.254: PanelLink2.5@77.47,16.233 77.47,16.002 78.74,14.732 78.74,13.081 80.574,11.247 113.99,11.247 116.713,13.97 116.713,15.494 117.094,15.875 117.094,17.526 117.348,17.78 R12.1@118.126,17.78
NetPanelLink2_6: PanelLink2.6 R11.1 | length 43
  Top Layer w0.254: PanelLink2.6@77.47,13.673 80.35,10.793 115.457,10.793 117.603,12.939 117.753,12.939 118.126,13.312 R11.1@118.126,13.462
NetPanelLink2_7: PanelLink2.7 R10.1 | length 47.7
  Top Layer w0.254: v1(113.665,11.938) 114.039,11.938 116.259,14.158 116.259,15.682 116.586,16.009 116.586,17.78 117.094,18.288 117.094,19.685 117.348,19.939 R10.1@118.126,19.939
  Bottom Layer w0.254: PanelLink2.7@80.01,16.233 81.28,14.963 81.28,12.954 82.987,11.247 105.161,11.247 105.163,11.249 112.976,11.249 v1(113.665,11.938)
NetR1_IND1_1: IND1.23 R1.1@243.713,20.209 | length 6.7
  Bottom Layer w0.254: IND1.23@237.673,20.697 239.264,20.697 239.776,21.209 242.563,21.209 243.563,20.209 R1.1@243.713,20.209
NetR1_IND2_1: IND2.23 R1.1@143.764,16.24 | length 6.1
  Bottom Layer w0.254: IND2.23@138.867,17.649 141.22,17.649 141.732,18.161 142.328,18.161 143.241,17.248 143.51,16.979 R1.1@143.51,16.256
NetR1_IND3_1: IND3.23 R1.1@57.531,20.463 | length 6.3
  Bottom Layer w0.254: IND3.23@51.745,20.697 53.971,20.697 54.218,20.944 ; 54.218,20.944 54.41,21.136 ; 54.41,21.136 54.483,21.209 56.635,21.209 57.381,20.463 R1.1@57.531,20.463
NetR3_OPTO1_1: OPTO1.23 R3.1@224.663,20.309 | length 7.9
  Top Layer w0.254: R3.1@224.663,20.309 225.668,20.309 226.549,21.19 228.492,21.19 228.981,20.701 231.969,20.701 OPTO1.23@231.973,20.697
NetR3_OPTO2_1: OPTO2.23 R3.1@150.495,19.928 | length 2.7
  Top Layer w0.254: R3.1@150.495,19.928 150.645,19.928 151.414,20.697 OPTO2.23@152.852,20.697
NetR3_OPTO3_1: OPTO3.23 R3.1@40.386,20.309 | length 6.1
  Top Layer w0.254: R3.1@40.536,20.309 41.436,21.209 44.577,21.209 45.085,20.701 46.041,20.701 OPTO3.23@46.045,20.697
NetR4_1: R4.1 R5.1 R13.2 RS1.8 | length 16.1
  Top Layer w0.254: R13.2@120.126,15.621 120.17,15.665 v1(121.793,15.665) ; v1@121.793,15.621 R5.1@123.333,15.621 ; v1(129.921,15.748) 129.921,14.538 RS1.8@129.936,14.523 129.936,12.677 130.152,12.461 130.167,12.461 130.54,12.088 R4.1@130.54,11.938
  Bottom Layer w0.254: v1(121.793,15.665) 121.837,15.665 122.472,16.3 127.464,16.3 128.187,15.577 129.697,15.577 129.868,15.748 v1(129.921,15.748)
NetR4_2: R4.2 R7.1 R12.2 RS1.7 | length 16
  Top Layer w0.254: R12.2@120.126,17.78 v1(121.666,17.78) R7.1@123.333,17.78 ; R4.2@128.54,11.938 128.54,12.088 129.286,12.834 RS1.7@129.286,14.523 v1(129.286,16.129)
  Bottom Layer w0.254: v1(121.666,17.78) 122.692,16.754 127.652,16.754 128.277,16.129 v1(129.286,16.129)
NetR6_ADC1_1: ADC1.10 R6.1@252.857,24.622 | length 4.8
  Top Layer w0.254: R6.1@252.857,24.622 254.873,24.622 255.27,25.019 ADC1.10@255.27,27.218 ; ADC1.10@255.266,26.968 ADC1.10@255.27,26.964
NetR6_ADC2_1: ADC2.10 R6.1@184.658,23.336 | length 4.8
  Top Layer w0.254: R6.1@184.658,23.336 186.674,23.336 187.071,23.733 ADC2.10@187.071,25.932
NetR6_ADC3_1: ADC3.10 R6.1@166.243,21.177 | length 4.8
  Top Layer w0.254: R6.1@166.243,21.177 168.259,21.177 168.656,21.574 ADC3.10@168.656,23.773
NetR6_ADC4_1: ADC4.10 R6.1@106.934,23.336 | length 4.8
  Top Layer w0.254: R6.1@106.934,23.336 108.95,23.336 109.347,23.733 ADC4.10@109.347,25.932
NetR6_ADC5_1: ADC5.10 R6.1@86.868,23.225 | length 3.7
  Top Layer w0.254: R6.1@86.868,23.225 88.757,23.225 89.277,23.745 ADC5.10@89.277,24.793
NetR6_ADC6_1: ADC6.10 R6.1@16.764,24.606 | length 4.8
  Top Layer w0.254: R6.1@16.764,24.606 18.78,24.606 19.177,25.003 ADC6.10@19.177,27.202
NetR8_1: R8.1 R11.2 RS1.6 | length 11.6
  Top Layer w0.254: R11.2@120.126,13.462 R8.1@123.333,13.462 123.317,13.446 123.317,12.319 123.742,11.894 126.884,11.894 127.905,12.915 128.231,12.915 128.636,13.32 RS1.6@128.636,14.523
NetR9_1: R9.1 R10.2 RS1.5 | length 14
  Top Layer w0.254: R10.2@120.126,19.939 121.539,19.939 121.793,19.685 ; v1(122.201,18.388) 122.174,18.415 121.793,18.796 121.793,19.685 ; R9.1@123.333,19.939 122.047,19.939 121.793,19.685 ; RS1.5@127.986,14.523 v1@127.986,17.443
  Bottom Layer w0.254: v1(122.201,18.388) 123.19,17.399 127.833,17.399 127.84,17.405 127.978,17.405 v1(128.016,17.443)
NetU1_IND1_2: IND1.2 IND2.22 | length 94.6
  Bottom Layer w0.254: IND2.22@138.867,18.299 138.876,18.29 141.099,18.29 141.532,18.723 141.539,18.723 142.247,19.431 142.875,19.431 143.432,18.874 146.001,18.874 147.066,19.939 230.378,19.939 231.118,20.679 231.955,20.679 IND1.2@231.973,20.697
NetU1_IND1_22: IND1.22
NetU1_IND2_2: IND2.2 IND3.22 | length 87.7
  Top Layer w0.254: v1(53.73,21.345) 54.483,22.098 65.913,22.098 v1(66.167,21.844) ; v1(104.14,21.971) 104.14,20.828 108.966,16.002 v1(109.474,16.002)
  Bottom Layer w0.254: IND3.22@51.745,21.347 53.71,21.347 53.712,21.345 v1(53.73,21.345) ; v1(66.167,21.844) 67.183,21.844 67.672,22.333 103.725,22.333 104.087,21.971 v1(104.14,21.971) ; v1(109.474,16.002) 109.728,15.748 118.138,15.748 121.802,19.412 128.543,19.412 130.306,17.649 IND2.2@133.167,17.649
NetU1_IND3_2: IND3.2 OPTO3.22 | length 3.2
  Top Layer w0.254: OPTO3.22@46.045,21.347 46.055,21.337 46.989,21.337 47.371,20.955 v1(47.371,20.701)
  Bottom Layer w0.254: IND3.2@46.045,20.697 46.063,20.715 47.238,20.715 47.318,20.795 47.371,20.742 v1(47.371,20.701)
NetU3_OPTO2_2: OPTO1.22 OPTO2.2 | length 74.7
  Top Layer w0.254: OPTO2.2@158.552,20.697 160.27,20.697 161.976,22.403 v1(161.979,22.403) ; v1@229.108,21.537 v1(229.108,21.59) 229.351,21.347 OPTO1.22@231.973,21.347
  Bottom Layer w0.254: v1(161.979,22.403) 162.011,22.435 176.796,22.435 176.84,22.479 191.657,22.479 192.546,21.59 v1(229.108,21.59)
NetU3_OPTO3_2: OPTO2.22 OPTO3.2 | length 119.2
  Top Layer w0.254: OPTO3.2@51.745,20.697 52.709,20.697 53.086,20.32 54.61,20.32 55.388,21.098 59.547,21.098 v1(59.817,20.828) ; v1(98.171,15.284) 98.209,15.246 98.347,15.246 98.354,15.24 99.568,15.24 102.362,18.034 105.41,18.034 110.153,13.291 v1(110.67,13.291) ; v1(146.812,12.827) 147.022,13.037 148.419,13.037 155.873,20.491 155.873,21.292 155.448,21.717 154.305,21.717 153.942,21.354 152.859,21.354 OPTO2.22@152.852,21.347
  Bottom Layer w0.254: v1(59.817,20.828) 62.596,20.828 64.12,19.304 81.28,19.304 86.487,14.097 92.964,14.097 93.726,14.859 97.746,14.859 v1(98.171,15.284) ; v1(110.67,13.291) 122.797,13.291 123.33,13.824 128.162,13.824 129.321,12.665 146.597,12.665 146.759,12.827 v1(146.812,12.827)
O\E\_\I\N\D\: 1.8 IND1.21 IND2.21 IND3.21 | length 208
  Top Layer w0.254: v1(126.755,22.343) 126.765,22.352 126.799,22.352 127.161,22.714 131.773,22.714 131.775,22.716 136.387,22.716 136.539,22.565 136.539,22.338 137.386,21.491 v1(137.386,21.472) ; v1(140.208,25.781) 141.21,25.781 141.471,25.52 1.8@141.471,24.41 141.471,23.383 141.932,22.921 141.932,18.469 142.24,18.161 142.748,18.161 143.256,17.653 144.907,17.653 v1(145.542,18.288) ; v1@230.789,19.431 233.426,19.431 233.858,19.863 v1(233.858,22.022)
  Bottom Layer w0.254: IND3.21@51.745,21.997 51.763,21.979 53.094,21.979 54.541,23.426 60.775,23.426 64.383,19.818 112.274,19.818 113.357,20.901 119.199,20.901 120.577,22.279 121.981,22.279 122.733,23.031 126.067,23.031 126.746,22.352 v1(126.755,22.343) ; v1(137.386,21.472) 137.414,21.5 137.414,21.698 ; v1@137.414,21.482 137.414,19.177 137.642,18.949 IND2.21@138.867,18.949 ; 137.414,21.717 137.414,24.257 137.922,24.765 139.192,24.765 v1(140.208,25.781) ; v1(145.542,18.288) 146.812,18.288 147.955,19.431 v1(230.759,19.431) ; v1(233.858,22.022) 233.858,21.997 IND1.21@237.673,21.997